# EAGLE board 14250-Qwiic RFID - IDXXLA-Panel (EAGLE 9.2.1), part 1 of 3
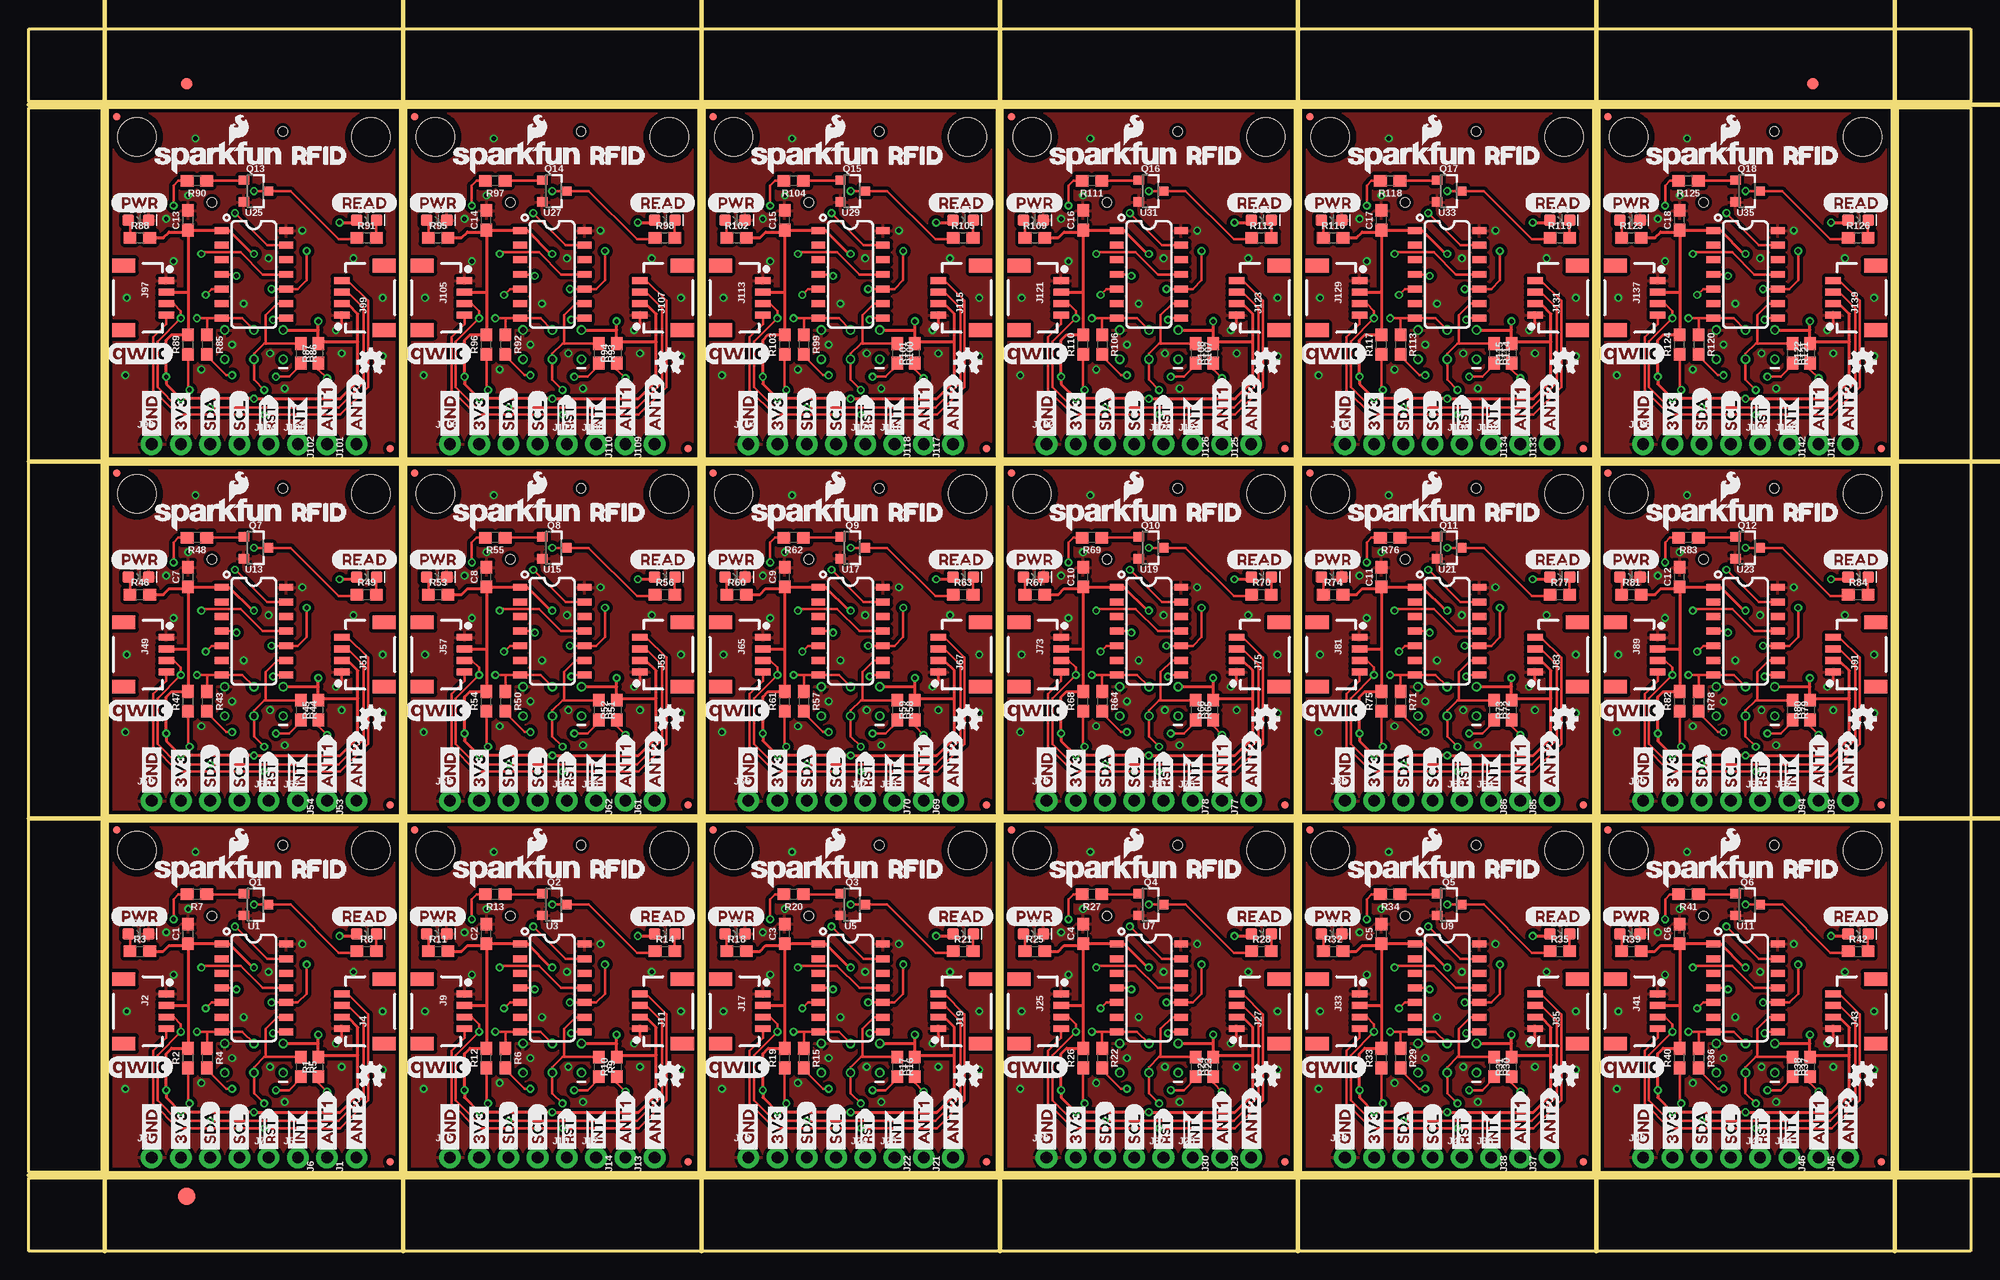
[diagram p0: board, top side]
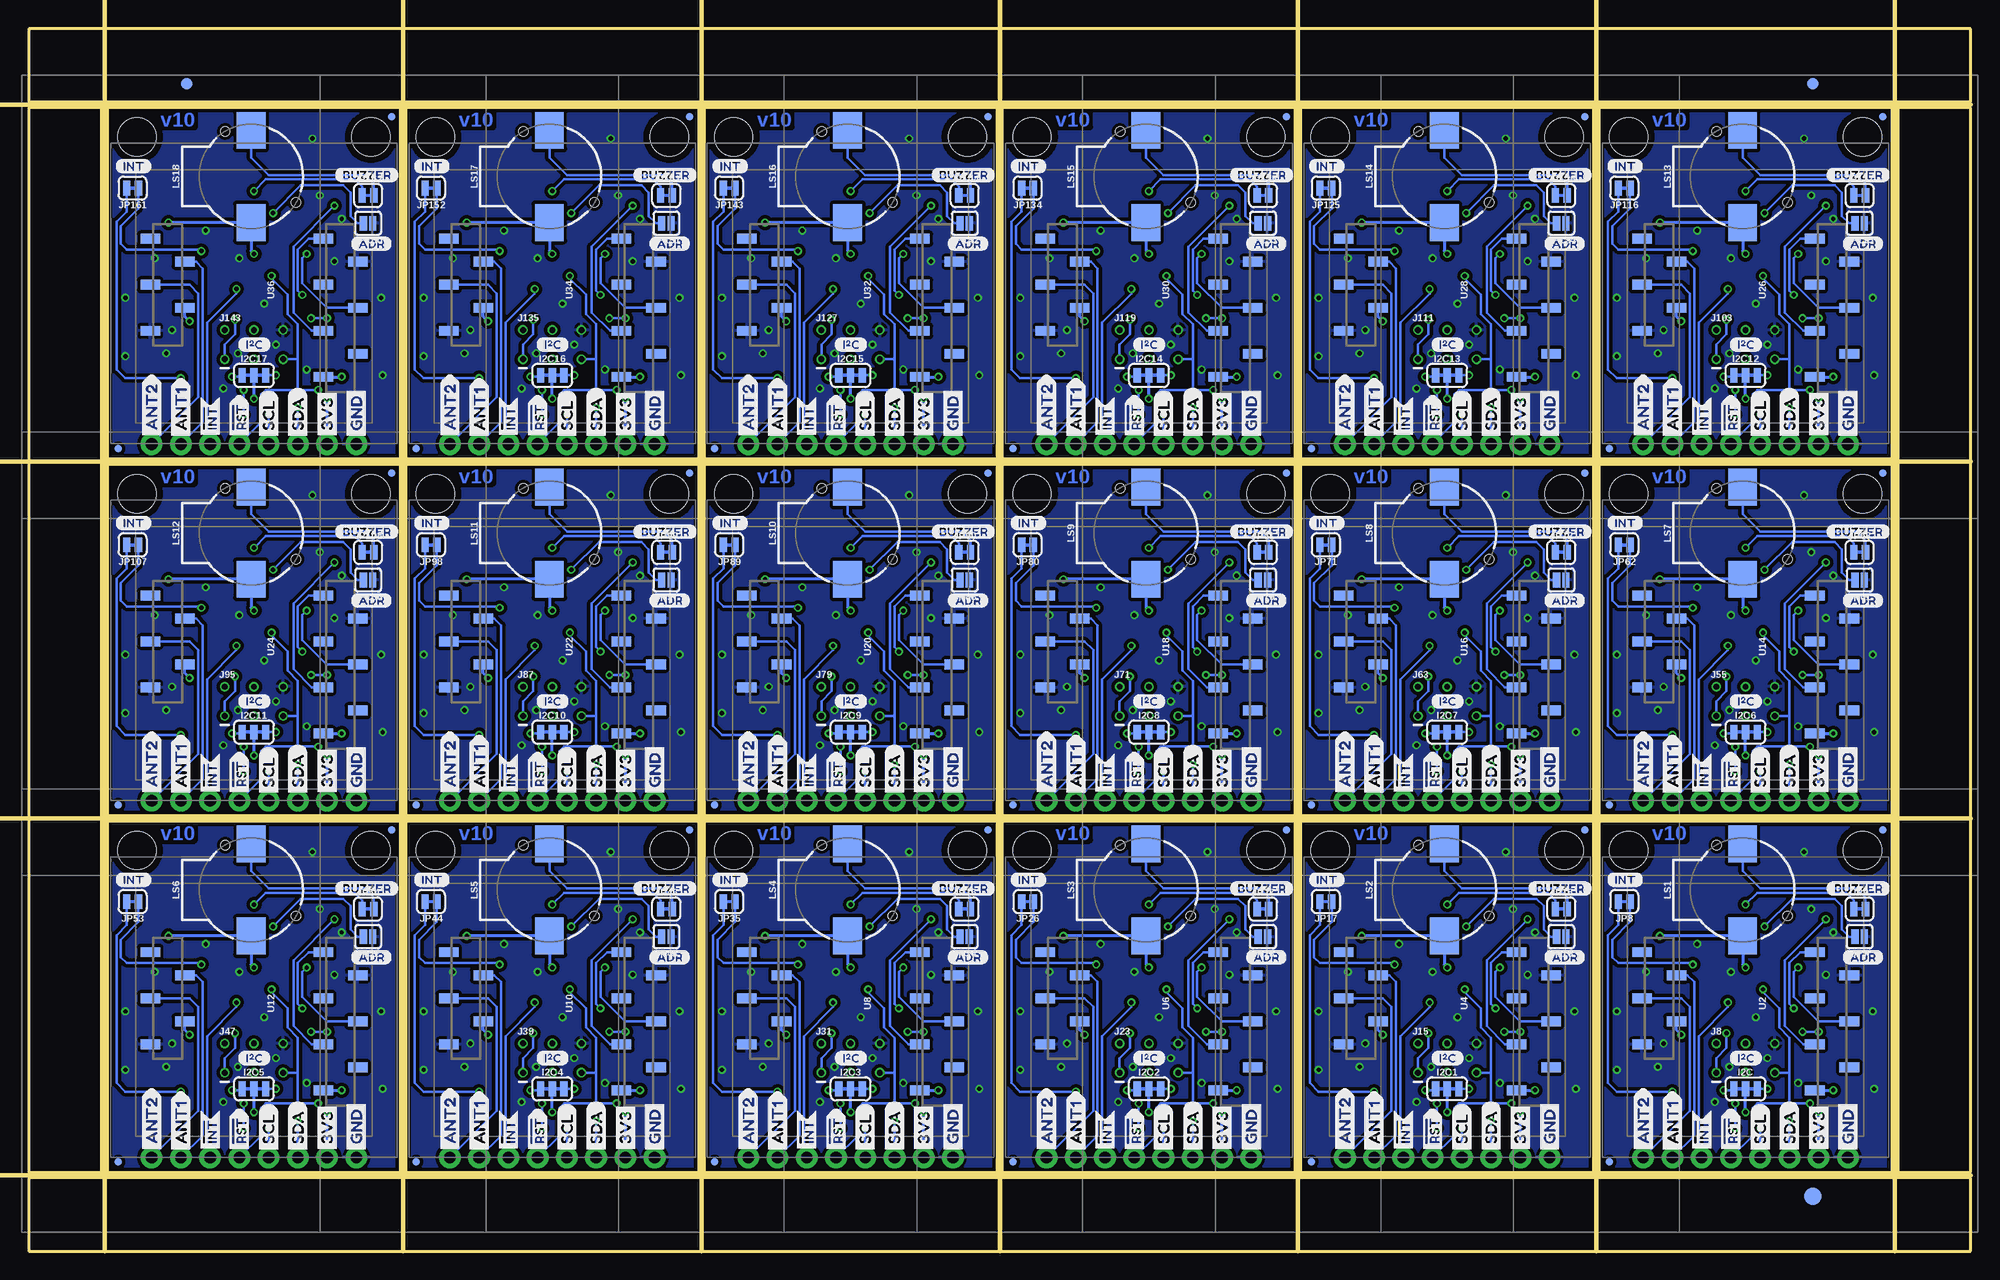
[diagram p1: board, bottom side, seen from below]

Size 168.66 x 106.17 mm. Coordinates in mm from the lower left corner, seen from the top.
Outline: 6.86,6.86 6.86,37.34 32.26,37.34 32.26,6.86 6.86,6.86
Outline: 32.77,6.86 32.77,37.34 58.17,37.34 58.17,6.86 32.77,6.86
Outline: 58.67,6.86 58.67,37.34 84.07,37.34 84.07,6.86 58.67,6.86
Outline: 84.58,6.86 84.58,37.34 109.98,37.34 109.98,6.86 84.58,6.86
Outline: 110.49,6.86 110.49,37.34 135.89,37.34 135.89,6.86 110.49,6.86
Outline: 136.4,6.86 136.4,37.34 161.8,37.34 161.8,6.86 136.4,6.86
Outline: 6.86,37.85 6.86,68.33 32.26,68.33 32.26,37.85 6.86,37.85
Outline: 32.77,37.85 32.77,68.33 58.17,68.33 58.17,37.85 32.77,37.85
Outline: 58.67,37.85 58.67,68.33 84.07,68.33 84.07,37.85 58.67,37.85
Outline: 84.58,37.85 84.58,68.33 109.98,68.33 109.98,37.85 84.58,37.85
Outline: 110.49,37.85 110.49,68.33 135.89,68.33 135.89,37.85 110.49,37.85
Outline: 136.4,37.85 136.4,68.33 161.8,68.33 161.8,37.85 136.4,37.85
Outline: 6.86,68.83 6.86,99.31 32.26,99.31 32.26,68.83 6.86,68.83
Outline: 32.77,68.83 32.77,99.31 58.17,99.31 58.17,68.83 32.77,68.83
Outline: 58.67,68.83 58.67,99.31 84.07,99.31 84.07,68.83 58.67,68.83
Outline: 84.58,68.83 84.58,99.31 109.98,99.31 109.98,68.83 84.58,68.83
Outline: 110.49,68.83 110.49,99.31 135.89,99.31 135.89,68.83 110.49,68.83
Outline: 136.4,68.83 136.4,99.31 161.8,99.31 161.8,68.83 136.4,68.83
Outline: 0,6.35 168.66,6.35 168.66,0 0,0 0,6.35
Outline: 162.31,99.31 168.66,99.31 168.66,6.86 162.31,6.86 162.31,99.31
Outline: 0,106.17 168.66,106.17 168.66,99.82 0,99.82 0,106.17
Outline: 0,99.31 6.35,99.31 6.35,6.86 0,6.86 0,99.31
Copper layers (1*16): Top 0.035mm / dielectric 1.5mm / Bottom 0.035mm
Design rules "SparkFun-2-layer-PCBWay-LIMIT": minimum track width 6mil, minimum drill 0.3mm, track to track 6mil, track to pad 6mil, pad to pad 6mil, via to via 6mil, smd to smd 6mil, copper to edge 6mil, drill to drill 6mil, minimum pad ring 6mil, minimum via ring 6mil, stop-mask expansion 4mil, vias tented up to drill 25mil, thermal gap 10mil
Net classes: 0 default: width 0.203 mm
Milling: 11 lines

## Footprints (pad centres in the part's own frame; a part is rotated, then mirrored left to right if it is on the bottom)
0603 = smd 1.1 x 1: 1 -0.85,0; 2 0.85,0
LED-0603 = smd 1 x 1: A -0.877,0; C 0.877,0
FIDUCIAL-1X2 = smd 1 x 1: 1 0,0
FIDUCIAL-1.5X3 = smd 1.5 x 1.5: 1 0,0
SMT-JUMPER_3_2-NC_TRACE_SILK = smd 0.635 x 1.27: 1 -1.016,0; 2 0,0; 3 1.016,0
1X01_NO_SILK = drill 1.016 pad 1.88: 1 0,0
1X04_1MM_RA = smd 0.6 x 1.35: 1 -1.5,0; 2 -0.5,0; 3 0.5,0; 4 1.5,0 | smd 1.2 x 2: NC1 2.8,-3.675; NC2 -2.8,-3.675
1X04_NO_SILK = drill 1.016 pad 1.88: 1 0,0; 2 2.54,0; 3 5.08,0; 4 7.62,0
2X3_TEST_POINTS = drill 0.508: 1 -2.54,-1.27; 2 -2.54,1.27; 3 0,-1.27; 4 0,1.27; 5 2.54,-1.27; 6 2.54,1.27
MICRO-FIDUCIAL = smd 0.635 x 0.635: 1 0,0
STAND-OFF = hole 3.302: 0,0
SMT-JUMPER_2_NO_SILK = smd 0.635 x 1.27: 1 -0.406,0; 2 0.406,0
SMT-JUMPER_2_NC_TRACE_SILK = smd 0.635 x 1.27: 1 -0.508,0; 2 0.508,0
BUZZER-CCV = smd 3.2 x 2.5: + 4,0; - -4,0 | hole 0.8: -3.9,-2.25; 2.25,3.9
SOT23-3 = smd 0.8 x 0.9: 1 -0.95,-1; 2 0.95,-1; 3 0,1.1
SO14 = smd 0.6 x 1.2: 1 -3.175,-2.8; 2 -1.905,-2.8; 3 -0.635,-2.8; 4 0.635,-2.8; 5 1.905,-2.8; 6 3.175,-2.8; 7 4.445,-2.8; 8 4.445,2.8; 9 3.175,2.8; 10 1.905,2.8; 11 0.635,2.8; 12 -0.635,2.8; 13 -1.905,2.8; 14 -3.175,2.8
ID-12_SMD = smd 0.85 x 1.7: 1 2.993,-8.998; 2 0.993,-5.998; 3 -1.007,-8.998; 4 -3.007,-5.998; 5 -5.007,-8.998; 6 -5.007,6.013; 7 -3.007,9.013; 8 -1.007,6.013; 9 0.993,9.013; 10 2.993,6.013; 11 6.993,6.013; NC 4.993,9.013

## Placement (x,y rotation side)
C1  0.1uF  [0603]  13.84,27.56 90 top
C2  0.1uF  [0603]  39.75,27.56 90 top
C3  0.1uF  [0603]  65.66,27.56 90 top
C4  0.1uF  [0603]  91.57,27.56 90 top
C5  0.1uF  [0603]  117.48,27.56 90 top
C6  0.1uF  [0603]  143.38,27.56 90 top
C7  0.1uF  [0603]  13.84,58.55 90 top
C8  0.1uF  [0603]  39.75,58.55 90 top
C9  0.1uF  [0603]  65.66,58.55 90 top
C10  0.1uF  [0603]  91.57,58.55 90 top
C11  0.1uF  [0603]  117.48,58.55 90 top
C12  0.1uF  [0603]  143.38,58.55 90 top
C13  0.1uF  [0603]  13.84,89.54 90 top
C14  0.1uF  [0603]  39.75,89.54 90 top
C15  0.1uF  [0603]  65.66,89.54 90 top
C16  0.1uF  [0603]  91.57,89.54 90 top
C17  0.1uF  [0603]  117.48,89.54 90 top
C18  0.1uF  [0603]  143.38,89.54 90 top
D1  RED  [LED-0603]  9.52,27.56 0 top
D2  BLUE  [LED-0603]  29.34,27.56 0 top
D3  RED  [LED-0603]  35.43,27.56 0 top
D4  BLUE  [LED-0603]  55.24,27.56 0 top
D5  RED  [LED-0603]  61.34,27.56 0 top
D6  BLUE  [LED-0603]  81.15,27.56 0 top
D7  RED  [LED-0603]  87.25,27.56 0 top
D8  BLUE  [LED-0603]  107.06,27.56 0 top
D9  RED  [LED-0603]  113.16,27.56 0 top
D10  BLUE  [LED-0603]  132.97,27.56 0 top
D11  RED  [LED-0603]  139.06,27.56 0 top
D12  BLUE  [LED-0603]  158.88,27.56 0 top
D13  RED  [LED-0603]  9.52,58.55 0 top
D14  BLUE  [LED-0603]  29.34,58.55 0 top
D15  RED  [LED-0603]  35.43,58.55 0 top
D16  BLUE  [LED-0603]  55.24,58.55 0 top
D17  RED  [LED-0603]  61.34,58.55 0 top
D18  BLUE  [LED-0603]  81.15,58.55 0 top
D19  RED  [LED-0603]  87.25,58.55 0 top
D20  BLUE  [LED-0603]  107.06,58.55 0 top
D21  RED  [LED-0603]  113.16,58.55 0 top
D22  BLUE  [LED-0603]  132.97,58.55 0 top
D23  RED  [LED-0603]  139.06,58.55 0 top
D24  BLUE  [LED-0603]  158.88,58.55 0 top
D25  RED  [LED-0603]  9.52,89.54 0 top
D26  BLUE  [LED-0603]  29.34,89.54 0 top
D27  RED  [LED-0603]  35.43,89.54 0 top
D28  BLUE  [LED-0603]  55.24,89.54 0 top
D29  RED  [LED-0603]  61.34,89.54 0 top
D30  BLUE  [LED-0603]  81.15,89.54 0 top
D31  RED  [LED-0603]  87.25,89.54 0 top
D32  BLUE  [LED-0603]  107.06,89.54 0 top
D33  RED  [LED-0603]  113.16,89.54 0 top
D34  BLUE  [LED-0603]  132.97,89.54 0 top
D35  RED  [LED-0603]  139.06,89.54 0 top
D36  BLUE  [LED-0603]  158.88,89.54 0 top
E$1  [FIDUCIAL-1X2]  13.72,101.41 0 top
E$2  [FIDUCIAL-1X2]  13.72,101.41 0 bottom
E$3  [FIDUCIAL-1X2]  154.94,101.41 0 top
E$4  [FIDUCIAL-1X2]  154.94,101.41 0 bottom
E$5  [FIDUCIAL-1.5X3]  13.72,4.76 0 top
E$6  [FIDUCIAL-1.5X3]  13.72,4.76 0 bottom
I2C  [SMT-JUMPER_3_2-NC_TRACE_SILK]  19.56,14.1 0 bottom
I2C1  [SMT-JUMPER_3_2-NC_TRACE_SILK]  45.47,14.1 0 bottom
I2C2  [SMT-JUMPER_3_2-NC_TRACE_SILK]  71.37,14.1 0 bottom
I2C3  [SMT-JUMPER_3_2-NC_TRACE_SILK]  97.28,14.1 0 bottom
I2C4  [SMT-JUMPER_3_2-NC_TRACE_SILK]  123.19,14.1 0 bottom
I2C5  [SMT-JUMPER_3_2-NC_TRACE_SILK]  149.1,14.1 0 bottom
I2C6  [SMT-JUMPER_3_2-NC_TRACE_SILK]  19.56,45.08 0 bottom
I2C7  [SMT-JUMPER_3_2-NC_TRACE_SILK]  45.47,45.08 0 bottom
I2C8  [SMT-JUMPER_3_2-NC_TRACE_SILK]  71.37,45.08 0 bottom
I2C9  [SMT-JUMPER_3_2-NC_TRACE_SILK]  97.28,45.08 0 bottom
I2C10  [SMT-JUMPER_3_2-NC_TRACE_SILK]  123.19,45.08 0 bottom
I2C11  [SMT-JUMPER_3_2-NC_TRACE_SILK]  149.1,45.08 0 bottom
I2C12  [SMT-JUMPER_3_2-NC_TRACE_SILK]  19.56,76.07 0 bottom
I2C13  [SMT-JUMPER_3_2-NC_TRACE_SILK]  45.47,76.07 0 bottom
I2C14  [SMT-JUMPER_3_2-NC_TRACE_SILK]  71.37,76.07 0 bottom
I2C15  [SMT-JUMPER_3_2-NC_TRACE_SILK]  97.28,76.07 0 bottom
I2C16  [SMT-JUMPER_3_2-NC_TRACE_SILK]  123.19,76.07 0 bottom
I2C17  [SMT-JUMPER_3_2-NC_TRACE_SILK]  149.1,76.07 0 bottom
J1  [1X01_NO_SILK]  28.45,8.13 90 top
J2  [1X04_1MM_RA]  11.94,20.83 270 top
J3  PTH  [1X04_NO_SILK]  10.67,8.13 0 top
J4  [1X04_1MM_RA]  27.18,20.83 90 top
J5  [1X01_NO_SILK]  23.37,8.13 0 top
J6  [1X01_NO_SILK]  25.91,8.13 90 top
J7  [1X01_NO_SILK]  20.83,8.13 0 top
J8  AVR_SPI_PROG_3X2TESTPOINTS  [2X3_TEST_POINTS]  19.56,16.76 0 bottom
J9  [1X04_1MM_RA]  37.85,20.83 270 top
J10  PTH  [1X04_NO_SILK]  36.58,8.13 0 top
J11  [1X04_1MM_RA]  53.09,20.83 90 top
J12  [1X01_NO_SILK]  49.28,8.13 0 top
J13  [1X01_NO_SILK]  54.36,8.13 90 top
J14  [1X01_NO_SILK]  51.82,8.13 90 top
J15  AVR_SPI_PROG_3X2TESTPOINTS  [2X3_TEST_POINTS]  45.47,16.76 0 bottom
J16  [1X01_NO_SILK]  46.74,8.13 0 top
J17  [1X04_1MM_RA]  63.75,20.83 270 top
J18  PTH  [1X04_NO_SILK]  62.48,8.13 0 top
J19  [1X04_1MM_RA]  78.99,20.83 90 top
J20  [1X01_NO_SILK]  75.18,8.13 0 top
J21  [1X01_NO_SILK]  80.26,8.13 90 top
J22  [1X01_NO_SILK]  77.72,8.13 90 top
J23  AVR_SPI_PROG_3X2TESTPOINTS  [2X3_TEST_POINTS]  71.37,16.76 0 bottom
J24  [1X01_NO_SILK]  72.64,8.13 0 top
J25  [1X04_1MM_RA]  89.66,20.83 270 top
J26  PTH  [1X04_NO_SILK]  88.39,8.13 0 top
J27  [1X04_1MM_RA]  104.9,20.83 90 top
J28  [1X01_NO_SILK]  101.09,8.13 0 top
J29  [1X01_NO_SILK]  106.17,8.13 90 top
J30  [1X01_NO_SILK]  103.63,8.13 90 top
J31  AVR_SPI_PROG_3X2TESTPOINTS  [2X3_TEST_POINTS]  97.28,16.76 0 bottom
J32  [1X01_NO_SILK]  98.55,8.13 0 top
J33  [1X04_1MM_RA]  115.57,20.83 270 top
J34  PTH  [1X04_NO_SILK]  114.3,8.13 0 top
J35  [1X04_1MM_RA]  130.81,20.83 90 top
J36  [1X01_NO_SILK]  127,8.13 0 top
J37  [1X01_NO_SILK]  132.08,8.13 90 top
J38  [1X01_NO_SILK]  129.54,8.13 90 top
J39  AVR_SPI_PROG_3X2TESTPOINTS  [2X3_TEST_POINTS]  123.19,16.76 0 bottom
J40  [1X01_NO_SILK]  124.46,8.13 0 top
J41  [1X04_1MM_RA]  141.48,20.83 270 top
J42  PTH  [1X04_NO_SILK]  140.21,8.13 0 top
J43  [1X04_1MM_RA]  156.72,20.83 90 top
J44  [1X01_NO_SILK]  152.91,8.13 0 top
J45  [1X01_NO_SILK]  157.99,8.13 90 top
J46  [1X01_NO_SILK]  155.45,8.13 90 top
J47  AVR_SPI_PROG_3X2TESTPOINTS  [2X3_TEST_POINTS]  149.1,16.76 0 bottom
J48  [1X01_NO_SILK]  150.37,8.13 0 top
J49  [1X04_1MM_RA]  11.94,51.82 270 top
J50  PTH  [1X04_NO_SILK]  10.67,39.12 0 top
J51  [1X04_1MM_RA]  27.18,51.82 90 top
J52  [1X01_NO_SILK]  23.37,39.12 0 top
J53  [1X01_NO_SILK]  28.45,39.12 90 top
J54  [1X01_NO_SILK]  25.91,39.12 90 top
J55  AVR_SPI_PROG_3X2TESTPOINTS  [2X3_TEST_POINTS]  19.56,47.75 0 bottom
J56  [1X01_NO_SILK]  20.83,39.12 0 top
J57  [1X04_1MM_RA]  37.85,51.82 270 top
J58  PTH  [1X04_NO_SILK]  36.58,39.12 0 top
J59  [1X04_1MM_RA]  53.09,51.82 90 top
J60  [1X01_NO_SILK]  49.28,39.12 0 top
J61  [1X01_NO_SILK]  54.36,39.12 90 top
J62  [1X01_NO_SILK]  51.82,39.12 90 top
J63  AVR_SPI_PROG_3X2TESTPOINTS  [2X3_TEST_POINTS]  45.47,47.75 0 bottom
J64  [1X01_NO_SILK]  46.74,39.12 0 top
J65  [1X04_1MM_RA]  63.75,51.82 270 top
J66  PTH  [1X04_NO_SILK]  62.48,39.12 0 top
J67  [1X04_1MM_RA]  78.99,51.82 90 top
J68  [1X01_NO_SILK]  75.18,39.12 0 top
J69  [1X01_NO_SILK]  80.26,39.12 90 top
J70  [1X01_NO_SILK]  77.72,39.12 90 top
J71  AVR_SPI_PROG_3X2TESTPOINTS  [2X3_TEST_POINTS]  71.37,47.75 0 bottom
J72  [1X01_NO_SILK]  72.64,39.12 0 top
J73  [1X04_1MM_RA]  89.66,51.82 270 top
J74  PTH  [1X04_NO_SILK]  88.39,39.12 0 top
J75  [1X04_1MM_RA]  104.9,51.82 90 top
J76  [1X01_NO_SILK]  101.09,39.12 0 top
J77  [1X01_NO_SILK]  106.17,39.12 90 top
J78  [1X01_NO_SILK]  103.63,39.12 90 top
J79  AVR_SPI_PROG_3X2TESTPOINTS  [2X3_TEST_POINTS]  97.28,47.75 0 bottom
J80  [1X01_NO_SILK]  98.55,39.12 0 top
J81  [1X04_1MM_RA]  115.57,51.82 270 top
J82  PTH  [1X04_NO_SILK]  114.3,39.12 0 top
J83  [1X04_1MM_RA]  130.81,51.82 90 top
J84  [1X01_NO_SILK]  127,39.12 0 top
J85  [1X01_NO_SILK]  132.08,39.12 90 top
J86  [1X01_NO_SILK]  129.54,39.12 90 top
J87  AVR_SPI_PROG_3X2TESTPOINTS  [2X3_TEST_POINTS]  123.19,47.75 0 bottom
J88  [1X01_NO_SILK]  124.46,39.12 0 top
J89  [1X04_1MM_RA]  141.48,51.82 270 top
J90  PTH  [1X04_NO_SILK]  140.21,39.12 0 top
J91  [1X04_1MM_RA]  156.72,51.82 90 top
J92  [1X01_NO_SILK]  152.91,39.12 0 top
J93  [1X01_NO_SILK]  157.99,39.12 90 top
J94  [1X01_NO_SILK]  155.45,39.12 90 top
J95  AVR_SPI_PROG_3X2TESTPOINTS  [2X3_TEST_POINTS]  149.1,47.75 0 bottom
J96  [1X01_NO_SILK]  150.37,39.12 0 top
J97  [1X04_1MM_RA]  11.94,82.8 270 top
J98  PTH  [1X04_NO_SILK]  10.67,70.1 0 top
J99  [1X04_1MM_RA]  27.18,82.8 90 top
J100  [1X01_NO_SILK]  23.37,70.1 0 top
J101  [1X01_NO_SILK]  28.45,70.1 90 top
J102  [1X01_NO_SILK]  25.91,70.1 90 top
J103  AVR_SPI_PROG_3X2TESTPOINTS  [2X3_TEST_POINTS]  19.56,78.74 0 bottom
J104  [1X01_NO_SILK]  20.83,70.1 0 top
J105  [1X04_1MM_RA]  37.85,82.8 270 top
J106  PTH  [1X04_NO_SILK]  36.58,70.1 0 top
J107  [1X04_1MM_RA]  53.09,82.8 90 top
J108  [1X01_NO_SILK]  49.28,70.1 0 top
J109  [1X01_NO_SILK]  54.36,70.1 90 top
J110  [1X01_NO_SILK]  51.82,70.1 90 top
J111  AVR_SPI_PROG_3X2TESTPOINTS  [2X3_TEST_POINTS]  45.47,78.74 0 bottom
J112  [1X01_NO_SILK]  46.74,70.1 0 top
J113  [1X04_1MM_RA]  63.75,82.8 270 top
J114  PTH  [1X04_NO_SILK]  62.48,70.1 0 top
J115  [1X04_1MM_RA]  78.99,82.8 90 top
J116  [1X01_NO_SILK]  75.18,70.1 0 top
J117  [1X01_NO_SILK]  80.26,70.1 90 top
J118  [1X01_NO_SILK]  77.72,70.1 90 top
J119  AVR_SPI_PROG_3X2TESTPOINTS  [2X3_TEST_POINTS]  71.37,78.74 0 bottom
J120  [1X01_NO_SILK]  72.64,70.1 0 top
J121  [1X04_1MM_RA]  89.66,82.8 270 top
J122  PTH  [1X04_NO_SILK]  88.39,70.1 0 top
J123  [1X04_1MM_RA]  104.9,82.8 90 top
J124  [1X01_NO_SILK]  101.09,70.1 0 top
J125  [1X01_NO_SILK]  106.17,70.1 90 top
J126  [1X01_NO_SILK]  103.63,70.1 90 top
J127  AVR_SPI_PROG_3X2TESTPOINTS  [2X3_TEST_POINTS]  97.28,78.74 0 bottom
J128  [1X01_NO_SILK]  98.55,70.1 0 top
J129  [1X04_1MM_RA]  115.57,82.8 270 top
J130  PTH  [1X04_NO_SILK]  114.3,70.1 0 top
J131  [1X04_1MM_RA]  130.81,82.8 90 top
J132  [1X01_NO_SILK]  127,70.1 0 top
J133  [1X01_NO_SILK]  132.08,70.1 90 top
J134  [1X01_NO_SILK]  129.54,70.1 90 top
J135  AVR_SPI_PROG_3X2TESTPOINTS  [2X3_TEST_POINTS]  123.19,78.74 0 bottom
J136  [1X01_NO_SILK]  124.46,70.1 0 top
J137  [1X04_1MM_RA]  141.48,82.8 270 top
J138  PTH  [1X04_NO_SILK]  140.21,70.1 0 top
J139  [1X04_1MM_RA]  156.72,82.8 90 top
J140  [1X01_NO_SILK]  152.91,70.1 0 top
J141  [1X01_NO_SILK]  157.99,70.1 90 top
J142  [1X01_NO_SILK]  155.45,70.1 90 top
J143  AVR_SPI_PROG_3X2TESTPOINTS  [2X3_TEST_POINTS]  149.1,78.74 0 bottom
J144  [1X01_NO_SILK]  150.37,70.1 0 top
JP1  FIDUCIALUFIDUCIAL  [MICRO-FIDUCIAL]  7.62,36.58 0 bottom
JP2  FIDUCIALUFIDUCIAL  [MICRO-FIDUCIAL]  31.37,7.75 0 top
JP3  STAND-OFF  [STAND-OFF]  9.4,34.8 0 top
JP4  STAND-OFF  [STAND-OFF]  29.72,34.8 0 top
JP5  FIDUCIALUFIDUCIAL  [MICRO-FIDUCIAL]  31.37,7.75 0 bottom
JP6  FIDUCIALUFIDUCIAL  [MICRO-FIDUCIAL]  7.62,36.58 0 top
JP7  ADR  [SMT-JUMPER_2_NO_SILK]  9.65,27.3 180 bottom
JP8  INT  [SMT-JUMPER_2_NC_TRACE_SILK]  30.1,30.35 180 bottom
JP9  BUZZ  [SMT-JUMPER_2_NC_TRACE_SILK]  9.65,29.72 0 bottom
JP10  STAND-OFF  [STAND-OFF]  35.31,34.8 0 top
JP11  STAND-OFF  [STAND-OFF]  55.63,34.8 0 top
JP12  FIDUCIALUFIDUCIAL  [MICRO-FIDUCIAL]  57.28,7.75 0 top
JP13  FIDUCIALUFIDUCIAL  [MICRO-FIDUCIAL]  33.53,36.58 0 top
JP14  FIDUCIALUFIDUCIAL  [MICRO-FIDUCIAL]  33.53,36.58 0 bottom
JP15  FIDUCIALUFIDUCIAL  [MICRO-FIDUCIAL]  57.28,7.75 0 bottom
JP16  ADR  [SMT-JUMPER_2_NO_SILK]  35.56,27.3 180 bottom
JP17  INT  [SMT-JUMPER_2_NC_TRACE_SILK]  56.01,30.35 180 bottom
JP18  BUZZ  [SMT-JUMPER_2_NC_TRACE_SILK]  35.56,29.72 0 bottom
JP19  STAND-OFF  [STAND-OFF]  61.21,34.8 0 top
JP20  STAND-OFF  [STAND-OFF]  81.53,34.8 0 top
JP21  FIDUCIALUFIDUCIAL  [MICRO-FIDUCIAL]  83.19,7.75 0 top
JP22  FIDUCIALUFIDUCIAL  [MICRO-FIDUCIAL]  59.44,36.58 0 top
JP23  FIDUCIALUFIDUCIAL  [MICRO-FIDUCIAL]  59.44,36.58 0 bottom
JP24  FIDUCIALUFIDUCIAL  [MICRO-FIDUCIAL]  83.19,7.75 0 bottom
JP25  ADR  [SMT-JUMPER_2_NO_SILK]  61.47,27.3 180 bottom
JP26  INT  [SMT-JUMPER_2_NC_TRACE_SILK]  81.92,30.35 180 bottom
JP27  BUZZ  [SMT-JUMPER_2_NC_TRACE_SILK]  61.47,29.72 0 bottom
JP28  STAND-OFF  [STAND-OFF]  87.12,34.8 0 top
JP29  STAND-OFF  [STAND-OFF]  107.44,34.8 0 top
JP30  FIDUCIALUFIDUCIAL  [MICRO-FIDUCIAL]  109.09,7.75 0 top
JP31  FIDUCIALUFIDUCIAL  [MICRO-FIDUCIAL]  85.34,36.58 0 top
JP32  FIDUCIALUFIDUCIAL  [MICRO-FIDUCIAL]  85.34,36.58 0 bottom
JP33  FIDUCIALUFIDUCIAL  [MICRO-FIDUCIAL]  109.09,7.75 0 bottom
JP34  ADR  [SMT-JUMPER_2_NO_SILK]  87.38,27.3 180 bottom
JP35  INT  [SMT-JUMPER_2_NC_TRACE_SILK]  107.82,30.35 180 bottom
JP36  BUZZ  [SMT-JUMPER_2_NC_TRACE_SILK]  87.38,29.72 0 bottom
JP37  STAND-OFF  [STAND-OFF]  113.03,34.8 0 top
JP38  STAND-OFF  [STAND-OFF]  133.35,34.8 0 top
JP39  FIDUCIALUFIDUCIAL  [MICRO-FIDUCIAL]  135,7.75 0 top
JP40  FIDUCIALUFIDUCIAL  [MICRO-FIDUCIAL]  111.25,36.58 0 top
JP41  FIDUCIALUFIDUCIAL  [MICRO-FIDUCIAL]  111.25,36.58 0 bottom
JP42  FIDUCIALUFIDUCIAL  [MICRO-FIDUCIAL]  135,7.75 0 bottom
JP43  ADR  [SMT-JUMPER_2_NO_SILK]  113.28,27.3 180 bottom
JP44  INT  [SMT-JUMPER_2_NC_TRACE_SILK]  133.73,30.35 180 bottom
JP45  BUZZ  [SMT-JUMPER_2_NC_TRACE_SILK]  113.28,29.72 0 bottom
JP46  STAND-OFF  [STAND-OFF]  138.94,34.8 0 top
JP47  STAND-OFF  [STAND-OFF]  159.26,34.8 0 top
JP48  FIDUCIALUFIDUCIAL  [MICRO-FIDUCIAL]  160.91,7.75 0 top
JP49  FIDUCIALUFIDUCIAL  [MICRO-FIDUCIAL]  137.16,36.58 0 top
JP50  FIDUCIALUFIDUCIAL  [MICRO-FIDUCIAL]  137.16,36.58 0 bottom
JP51  FIDUCIALUFIDUCIAL  [MICRO-FIDUCIAL]  160.91,7.75 0 bottom
JP52  ADR  [SMT-JUMPER_2_NO_SILK]  139.19,27.3 180 bottom
JP53  INT  [SMT-JUMPER_2_NC_TRACE_SILK]  159.64,30.35 180 bottom
JP54  BUZZ  [SMT-JUMPER_2_NC_TRACE_SILK]  139.19,29.72 0 bottom
JP55  STAND-OFF  [STAND-OFF]  9.4,65.79 0 top
JP56  STAND-OFF  [STAND-OFF]  29.72,65.79 0 top
JP57  FIDUCIALUFIDUCIAL  [MICRO-FIDUCIAL]  31.37,38.73 0 top
JP58  FIDUCIALUFIDUCIAL  [MICRO-FIDUCIAL]  7.62,67.56 0 top
JP59  FIDUCIALUFIDUCIAL  [MICRO-FIDUCIAL]  7.62,67.56 0 bottom
JP60  FIDUCIALUFIDUCIAL  [MICRO-FIDUCIAL]  31.37,38.73 0 bottom
JP61  ADR  [SMT-JUMPER_2_NO_SILK]  9.65,58.29 180 bottom
JP62  INT  [SMT-JUMPER_2_NC_TRACE_SILK]  30.1,61.34 180 bottom
JP63  BUZZ  [SMT-JUMPER_2_NC_TRACE_SILK]  9.65,60.71 0 bottom
JP64  STAND-OFF  [STAND-OFF]  35.31,65.79 0 top
JP65  STAND-OFF  [STAND-OFF]  55.63,65.79 0 top
JP66  FIDUCIALUFIDUCIAL  [MICRO-FIDUCIAL]  57.28,38.73 0 top
JP67  FIDUCIALUFIDUCIAL  [MICRO-FIDUCIAL]  33.53,67.56 0 top
JP68  FIDUCIALUFIDUCIAL  [MICRO-FIDUCIAL]  33.53,67.56 0 bottom
JP69  FIDUCIALUFIDUCIAL  [MICRO-FIDUCIAL]  57.28,38.73 0 bottom
JP70  ADR  [SMT-JUMPER_2_NO_SILK]  35.56,58.29 180 bottom
JP71  INT  [SMT-JUMPER_2_NC_TRACE_SILK]  56.01,61.34 180 bottom
JP72  BUZZ  [SMT-JUMPER_2_NC_TRACE_SILK]  35.56,60.71 0 bottom
JP73  STAND-OFF  [STAND-OFF]  61.21,65.79 0 top
JP74  STAND-OFF  [STAND-OFF]  81.53,65.79 0 top
JP75  FIDUCIALUFIDUCIAL  [MICRO-FIDUCIAL]  83.19,38.73 0 top
JP76  FIDUCIALUFIDUCIAL  [MICRO-FIDUCIAL]  59.44,67.56 0 top
JP77  FIDUCIALUFIDUCIAL  [MICRO-FIDUCIAL]  59.44,67.56 0 bottom
JP78  FIDUCIALUFIDUCIAL  [MICRO-FIDUCIAL]  83.19,38.73 0 bottom
JP79  ADR  [SMT-JUMPER_2_NO_SILK]  61.47,58.29 180 bottom
JP80  INT  [SMT-JUMPER_2_NC_TRACE_SILK]  81.92,61.34 180 bottom
JP81  BUZZ  [SMT-JUMPER_2_NC_TRACE_SILK]  61.47,60.71 0 bottom
JP82  STAND-OFF  [STAND-OFF]  87.12,65.79 0 top
JP83  STAND-OFF  [STAND-OFF]  107.44,65.79 0 top
JP84  FIDUCIALUFIDUCIAL  [MICRO-FIDUCIAL]  109.09,38.73 0 top
JP85  FIDUCIALUFIDUCIAL  [MICRO-FIDUCIAL]  85.34,67.56 0 top
JP86  FIDUCIALUFIDUCIAL  [MICRO-FIDUCIAL]  85.34,67.56 0 bottom
JP87  FIDUCIALUFIDUCIAL  [MICRO-FIDUCIAL]  109.09,38.73 0 bottom
JP88  ADR  [SMT-JUMPER_2_NO_SILK]  87.38,58.29 180 bottom
JP89  INT  [SMT-JUMPER_2_NC_TRACE_SILK]  107.82,61.34 180 bottom
JP90  BUZZ  [SMT-JUMPER_2_NC_TRACE_SILK]  87.38,60.71 0 bottom
JP91  STAND-OFF  [STAND-OFF]  113.03,65.79 0 top
JP92  STAND-OFF  [STAND-OFF]  133.35,65.79 0 top
JP93  FIDUCIALUFIDUCIAL  [MICRO-FIDUCIAL]  135,38.73 0 top
JP94  FIDUCIALUFIDUCIAL  [MICRO-FIDUCIAL]  111.25,67.56 0 top
JP95  FIDUCIALUFIDUCIAL  [MICRO-FIDUCIAL]  111.25,67.56 0 bottom
JP96  FIDUCIALUFIDUCIAL  [MICRO-FIDUCIAL]  135,38.73 0 bottom
JP97  ADR  [SMT-JUMPER_2_NO_SILK]  113.28,58.29 180 bottom
JP98  INT  [SMT-JUMPER_2_NC_TRACE_SILK]  133.73,61.34 180 bottom
JP99  BUZZ  [SMT-JUMPER_2_NC_TRACE_SILK]  113.28,60.71 0 bottom
JP100  STAND-OFF  [STAND-OFF]  138.94,65.79 0 top
JP101  STAND-OFF  [STAND-OFF]  159.26,65.79 0 top
JP102  FIDUCIALUFIDUCIAL  [MICRO-FIDUCIAL]  160.91,38.73 0 top
JP103  FIDUCIALUFIDUCIAL  [MICRO-FIDUCIAL]  137.16,67.56 0 top
JP104  FIDUCIALUFIDUCIAL  [MICRO-FIDUCIAL]  137.16,67.56 0 bottom
JP105  FIDUCIALUFIDUCIAL  [MICRO-FIDUCIAL]  160.91,38.73 0 bottom
JP106  ADR  [SMT-JUMPER_2_NO_SILK]  139.19,58.29 180 bottom
JP107  INT  [SMT-JUMPER_2_NC_TRACE_SILK]  159.64,61.34 180 bottom
JP108  BUZZ  [SMT-JUMPER_2_NC_TRACE_SILK]  139.19,60.71 0 bottom
JP109  STAND-OFF  [STAND-OFF]  9.4,96.77 0 top
JP110  STAND-OFF  [STAND-OFF]  29.72,96.77 0 top
JP111  FIDUCIALUFIDUCIAL  [MICRO-FIDUCIAL]  31.37,69.72 0 top
JP112  FIDUCIALUFIDUCIAL  [MICRO-FIDUCIAL]  7.62,98.55 0 top
JP113  FIDUCIALUFIDUCIAL  [MICRO-FIDUCIAL]  7.62,98.55 0 bottom
JP114  FIDUCIALUFIDUCIAL  [MICRO-FIDUCIAL]  31.37,69.72 0 bottom
JP115  ADR  [SMT-JUMPER_2_NO_SILK]  9.65,89.28 180 bottom
JP116  INT  [SMT-JUMPER_2_NC_TRACE_SILK]  30.1,92.33 180 bottom
JP117  BUZZ  [SMT-JUMPER_2_NC_TRACE_SILK]  9.65,91.69 0 bottom
JP118  STAND-OFF  [STAND-OFF]  35.31,96.77 0 top
JP119  STAND-OFF  [STAND-OFF]  55.63,96.77 0 top
JP120  FIDUCIALUFIDUCIAL  [MICRO-FIDUCIAL]  57.28,69.72 0 top
JP121  FIDUCIALUFIDUCIAL  [MICRO-FIDUCIAL]  33.53,98.55 0 top
JP122  FIDUCIALUFIDUCIAL  [MICRO-FIDUCIAL]  33.53,98.55 0 bottom
JP123  FIDUCIALUFIDUCIAL  [MICRO-FIDUCIAL]  57.28,69.72 0 bottom
JP124  ADR  [SMT-JUMPER_2_NO_SILK]  35.56,89.28 180 bottom
JP125  INT  [SMT-JUMPER_2_NC_TRACE_SILK]  56.01,92.33 180 bottom
JP126  BUZZ  [SMT-JUMPER_2_NC_TRACE_SILK]  35.56,91.69 0 bottom
JP127  STAND-OFF  [STAND-OFF]  61.21,96.77 0 top
JP128  STAND-OFF  [STAND-OFF]  81.53,96.77 0 top
JP129  FIDUCIALUFIDUCIAL  [MICRO-FIDUCIAL]  83.19,69.72 0 top
JP130  FIDUCIALUFIDUCIAL  [MICRO-FIDUCIAL]  59.44,98.55 0 top
JP131  FIDUCIALUFIDUCIAL  [MICRO-FIDUCIAL]  59.44,98.55 0 bottom
JP132  FIDUCIALUFIDUCIAL  [MICRO-FIDUCIAL]  83.19,69.72 0 bottom
JP133  ADR  [SMT-JUMPER_2_NO_SILK]  61.47,89.28 180 bottom
JP134  INT  [SMT-JUMPER_2_NC_TRACE_SILK]  81.92,92.33 180 bottom
JP135  BUZZ  [SMT-JUMPER_2_NC_TRACE_SILK]  61.47,91.69 0 bottom
JP136  STAND-OFF  [STAND-OFF]  87.12,96.77 0 top
JP137  STAND-OFF  [STAND-OFF]  107.44,96.77 0 top
JP138  FIDUCIALUFIDUCIAL  [MICRO-FIDUCIAL]  109.09,69.72 0 top
JP139  FIDUCIALUFIDUCIAL  [MICRO-FIDUCIAL]  85.34,98.55 0 top
JP140  FIDUCIALUFIDUCIAL  [MICRO-FIDUCIAL]  85.34,98.55 0 bottom
JP141  FIDUCIALUFIDUCIAL  [MICRO-FIDUCIAL]  109.09,69.72 0 bottom
JP142  ADR  [SMT-JUMPER_2_NO_SILK]  87.38,89.28 180 bottom
JP143  INT  [SMT-JUMPER_2_NC_TRACE_SILK]  107.82,92.33 180 bottom
JP144  BUZZ  [SMT-JUMPER_2_NC_TRACE_SILK]  87.38,91.69 0 bottom
JP145  STAND-OFF  [STAND-OFF]  113.03,96.77 0 top
JP146  STAND-OFF  [STAND-OFF]  133.35,96.77 0 top
JP147  FIDUCIALUFIDUCIAL  [MICRO-FIDUCIAL]  135,69.72 0 top
JP148  FIDUCIALUFIDUCIAL  [MICRO-FIDUCIAL]  111.25,98.55 0 top
JP149  FIDUCIALUFIDUCIAL  [MICRO-FIDUCIAL]  111.25,98.55 0 bottom
JP150  FIDUCIALUFIDUCIAL  [MICRO-FIDUCIAL]  135,69.72 0 bottom
JP151  ADR  [SMT-JUMPER_2_NO_SILK]  113.28,89.28 180 bottom
JP152  INT  [SMT-JUMPER_2_NC_TRACE_SILK]  133.73,92.33 180 bottom
JP153  BUZZ  [SMT-JUMPER_2_NC_TRACE_SILK]  113.28,91.69 0 bottom
JP154  STAND-OFF  [STAND-OFF]  138.94,96.77 0 top
JP155  STAND-OFF  [STAND-OFF]  159.26,96.77 0 top
JP156  FIDUCIALUFIDUCIAL  [MICRO-FIDUCIAL]  160.91,69.72 0 top
JP157  FIDUCIALUFIDUCIAL  [MICRO-FIDUCIAL]  137.16,98.55 0 top
JP158  FIDUCIALUFIDUCIAL  [MICRO-FIDUCIAL]  137.16,98.55 0 bottom
JP159  FIDUCIALUFIDUCIAL  [MICRO-FIDUCIAL]  160.91,69.72 0 bottom
JP160  ADR  [SMT-JUMPER_2_NO_SILK]  139.19,89.28 180 bottom
JP161  INT  [SMT-JUMPER_2_NC_TRACE_SILK]  159.64,92.33 180 bottom
JP162  BUZZ  [SMT-JUMPER_2_NC_TRACE_SILK]  139.19,91.69 0 bottom
LOGO1  OSHW-LOGOMINI  [OSHW-LOGO-MINI]  29.72,15.24 0 top
LOGO2  OSHW-LOGOMINI  [OSHW-LOGO-MINI]  55.63,15.24 0 top
LOGO3  SFE_LOGO_NAME_FLAME.1_INCH  [SFE_LOGO_NAME_FLAME_.1]  16.51,33.02 0 top
LOGO4  SFE_LOGO_NAME_FLAME.1_INCH  [SFE_LOGO_NAME_FLAME_.1]  42.42,33.02 0 top
LOGO5  OSHW-LOGOMINI  [OSHW-LOGO-MINI]  81.53,15.24 0 top
LOGO6  SFE_LOGO_NAME_FLAME.1_INCH  [SFE_LOGO_NAME_FLAME_.1]  68.33,33.02 0 top
LOGO7  OSHW-LOGOMINI  [OSHW-LOGO-MINI]  107.44,15.24 0 top
LOGO8  SFE_LOGO_NAME_FLAME.1_INCH  [SFE_LOGO_NAME_FLAME_.1]  94.23,33.02 0 top
LOGO9  OSHW-LOGOMINI  [OSHW-LOGO-MINI]  133.35,15.24 0 top
LOGO10  SFE_LOGO_NAME_FLAME.1_INCH  [SFE_LOGO_NAME_FLAME_.1]  120.14,33.02 0 top
LOGO11  OSHW-LOGOMINI  [OSHW-LOGO-MINI]  159.26,15.24 0 top
LOGO12  SFE_LOGO_NAME_FLAME.1_INCH  [SFE_LOGO_NAME_FLAME_.1]  146.05,33.02 0 top
LOGO13  OSHW-LOGOMINI  [OSHW-LOGO-MINI]  29.72,46.23 0 top
LOGO14  SFE_LOGO_NAME_FLAME.1_INCH  [SFE_LOGO_NAME_FLAME_.1]  16.51,64.01 0 top
LOGO15  OSHW-LOGOMINI  [OSHW-LOGO-MINI]  55.63,46.23 0 top
LOGO16  SFE_LOGO_NAME_FLAME.1_INCH  [SFE_LOGO_NAME_FLAME_.1]  42.42,64.01 0 top
LOGO17  OSHW-LOGOMINI  [OSHW-LOGO-MINI]  81.53,46.23 0 top
LOGO18  SFE_LOGO_NAME_FLAME.1_INCH  [SFE_LOGO_NAME_FLAME_.1]  68.33,64.01 0 top
LOGO19  OSHW-LOGOMINI  [OSHW-LOGO-MINI]  107.44,46.23 0 top
LOGO20  SFE_LOGO_NAME_FLAME.1_INCH  [SFE_LOGO_NAME_FLAME_.1]  94.23,64.01 0 top
LOGO21  OSHW-LOGOMINI  [OSHW-LOGO-MINI]  133.35,46.23 0 top
LOGO22  SFE_LOGO_NAME_FLAME.1_INCH  [SFE_LOGO_NAME_FLAME_.1]  120.14,64.01 0 top
LOGO23  OSHW-LOGOMINI  [OSHW-LOGO-MINI]  159.26,46.23 0 top
LOGO24  SFE_LOGO_NAME_FLAME.1_INCH  [SFE_LOGO_NAME_FLAME_.1]  146.05,64.01 0 top
LOGO25  OSHW-LOGOMINI  [OSHW-LOGO-MINI]  29.72,77.22 0 top
LOGO26  SFE_LOGO_NAME_FLAME.1_INCH  [SFE_LOGO_NAME_FLAME_.1]  16.51,95 0 top
LOGO27  OSHW-LOGOMINI  [OSHW-LOGO-MINI]  55.63,77.22 0 top
LOGO28  SFE_LOGO_NAME_FLAME.1_INCH  [SFE_LOGO_NAME_FLAME_.1]  42.42,95 0 top
LOGO29  OSHW-LOGOMINI  [OSHW-LOGO-MINI]  81.53,77.22 0 top
LOGO30  SFE_LOGO_NAME_FLAME.1_INCH  [SFE_LOGO_NAME_FLAME_.1]  68.33,95 0 top
LOGO31  OSHW-LOGOMINI  [OSHW-LOGO-MINI]  107.44,77.22 0 top
LOGO32  SFE_LOGO_NAME_FLAME.1_INCH  [SFE_LOGO_NAME_FLAME_.1]  94.23,95 0 top
LOGO33  OSHW-LOGOMINI  [OSHW-LOGO-MINI]  133.35,77.22 0 top
LOGO34  SFE_LOGO_NAME_FLAME.1_INCH  [SFE_LOGO_NAME_FLAME_.1]  120.14,95 0 top
LOGO35  OSHW-LOGOMINI  [OSHW-LOGO-MINI]  159.26,77.22 0 top
LOGO36  SFE_LOGO_NAME_FLAME.1_INCH  [SFE_LOGO_NAME_FLAME_.1]  146.05,95 0 top
LS1  BUZZER-SMD  [BUZZER-CCV]  19.81,31.37 270 bottom
LS2  BUZZER-SMD  [BUZZER-CCV]  45.72,31.37 270 bottom
LS3  BUZZER-SMD  [BUZZER-CCV]  71.63,31.37 270 bottom
LS4  BUZZER-SMD  [BUZZER-CCV]  97.54,31.37 270 bottom
LS5  BUZZER-SMD  [BUZZER-CCV]  123.44,31.37 270 bottom
LS6  BUZZER-SMD  [BUZZER-CCV]  149.35,31.37 270 bottom
LS7  BUZZER-SMD  [BUZZER-CCV]  19.81,62.36 270 bottom
LS8  BUZZER-SMD  [BUZZER-CCV]  45.72,62.36 270 bottom
LS9  BUZZER-SMD  [BUZZER-CCV]  71.63,62.36 270 bottom
LS10  BUZZER-SMD  [BUZZER-CCV]  97.54,62.36 270 bottom
LS11  BUZZER-SMD  [BUZZER-CCV]  123.44,62.36 270 bottom
LS12  BUZZER-SMD  [BUZZER-CCV]  149.35,62.36 270 bottom
LS13  BUZZER-SMD  [BUZZER-CCV]  19.81,93.34 270 bottom
LS14  BUZZER-SMD  [BUZZER-CCV]  45.72,93.34 270 bottom
LS15  BUZZER-SMD  [BUZZER-CCV]  71.63,93.34 270 bottom
LS16  BUZZER-SMD  [BUZZER-CCV]  97.54,93.34 270 bottom
LS17  BUZZER-SMD  [BUZZER-CCV]  123.44,93.34 270 bottom
LS18  BUZZER-SMD  [BUZZER-CCV]  149.35,93.34 270 bottom
Q1  600mA/40V  [SOT23-3]  19.68,30.1 270 top
Q2  600mA/40V  [SOT23-3]  45.59,30.1 270 top
Q3  600mA/40V  [SOT23-3]  71.5,30.1 270 top
Q4  600mA/40V  [SOT23-3]  97.41,30.1 270 top
Q5  600mA/40V  [SOT23-3]  123.32,30.1 270 top
Q6  600mA/40V  [SOT23-3]  149.22,30.1 270 top
Q7  600mA/40V  [SOT23-3]  19.68,61.09 270 top
Q8  600mA/40V  [SOT23-3]  45.59,61.09 270 top
Q9  600mA/40V  [SOT23-3]  71.5,61.09 270 top
Q10  600mA/40V  [SOT23-3]  97.41,61.09 270 top
Q11  600mA/40V  [SOT23-3]  123.32,61.09 270 top
Q12  600mA/40V  [SOT23-3]  149.22,61.09 270 top
Q13  600mA/40V  [SOT23-3]  19.68,92.08 270 top
Q14  600mA/40V  [SOT23-3]  45.59,92.08 270 top
Q15  600mA/40V  [SOT23-3]  71.5,92.08 270 top
Q16  600mA/40V  [SOT23-3]  97.41,92.08 270 top
Q17  600mA/40V  [SOT23-3]  123.32,92.08 270 top
Q18  600mA/40V  [SOT23-3]  149.22,92.08 270 top
R1  10k  [0603]  25.15,16 90 top
R2  10k  [0603]  13.84,16.76 90 top
R3  1k  [0603]  9.65,26.04 0 top
R4  2.2k  [0603]  15.49,16.76 270 top
R5  2.2k  [0603]  23.62,16 270 top
R6  2.2k  [0603]  41.4,16.76 270 top
R7  1k  [0603]  14.61,30.99 180 top
R8  1k  [0603]  29.34,26.04 0 top
R9  2.2k  [0603]  49.53,16 270 top
R10  10k  [0603]  51.05,16 90 top
R11  1k  [0603]  35.56,26.04 0 top
R12  10k  [0603]  39.75,16.76 90 top
R13  1k  [0603]  40.51,30.99 180 top
R14  1k  [0603]  55.24,26.04 0 top
R15  2.2k  [0603]  67.31,16.76 270 top
R16  2.2k  [0603]  75.44,16 270 top
R17  10k  [0603]  76.96,16 90 top
R18  1k  [0603]  61.47,26.04 0 top
R19  10k  [0603]  65.66,16.76 90 top
R20  1k  [0603]  66.42,30.99 180 top
R21  1k  [0603]  81.15,26.04 0 top
R22  2.2k  [0603]  93.22,16.76 270 top
R23  2.2k  [0603]  101.35,16 270 top
R24  10k  [0603]  102.87,16 90 top
R25  1k  [0603]  87.38,26.04 0 top
R26  10k  [0603]  91.57,16.76 90 top
R27  1k  [0603]  92.33,30.99 180 top
R28  1k  [0603]  107.06,26.04 0 top
R29  2.2k  [0603]  119.13,16.76 270 top
R30  2.2k  [0603]  127.25,16 270 top
R31  10k  [0603]  128.78,16 90 top
R32  1k  [0603]  113.28,26.04 0 top
R33  10k  [0603]  117.48,16.76 90 top
R34  1k  [0603]  118.24,30.99 180 top
R35  1k  [0603]  132.97,26.04 0 top
R36  2.2k  [0603]  145.03,16.76 270 top
R37  2.2k  [0603]  153.16,16 270 top
R38  10k  [0603]  154.69,16 90 top
R39  1k  [0603]  139.19,26.04 0 top
R40  10k  [0603]  143.38,16.76 90 top
R41  1k  [0603]  144.15,30.99 180 top
R42  1k  [0603]  158.88,26.04 0 top
R43  2.2k  [0603]  15.49,47.75 270 top
R44  2.2k  [0603]  23.62,46.99 270 top
R45  10k  [0603]  25.15,46.99 90 top
R46  1k  [0603]  9.65,57.02 0 top
R47  10k  [0603]  13.84,47.75 90 top
R48  1k  [0603]  14.61,61.98 180 top
R49  1k  [0603]  29.34,57.02 0 top
R50  2.2k  [0603]  41.4,47.75 270 top
R51  2.2k  [0603]  49.53,46.99 270 top
R52  10k  [0603]  51.05,46.99 90 top
R53  1k  [0603]  35.56,57.02 0 top
R54  10k  [0603]  39.75,47.75 90 top
R55  1k  [0603]  40.51,61.98 180 top
R56  1k  [0603]  55.24,57.02 0 top
R57  2.2k  [0603]  67.31,47.75 270 top
R58  2.2k  [0603]  75.44,46.99 270 top
R59  10k  [0603]  76.96,46.99 90 top
R60  1k  [0603]  61.47,57.02 0 top
R61  10k  [0603]  65.66,47.75 90 top
R62  1k  [0603]  66.42,61.98 180 top
R63  1k  [0603]  81.15,57.02 0 top
R64  2.2k  [0603]  93.22,47.75 270 top
R65  2.2k  [0603]  101.35,46.99 270 top
R66  10k  [0603]  102.87,46.99 90 top
R67  1k  [0603]  87.38,57.02 0 top
R68  10k  [0603]  91.57,47.75 90 top
R69  1k  [0603]  92.33,61.98 180 top
R70  1k  [0603]  107.06,57.02 0 top
R71  2.2k  [0603]  119.13,47.75 270 top
R72  2.2k  [0603]  127.25,46.99 270 top
R73  10k  [0603]  128.78,46.99 90 top
R74  1k  [0603]  113.28,57.02 0 top
R75  10k  [0603]  117.48,47.75 90 top
R76  1k  [0603]  118.24,61.98 180 top
R77  1k  [0603]  132.97,57.02 0 top
R78  2.2k  [0603]  145.03,47.75 270 top
R79  2.2k  [0603]  153.16,46.99 270 top
R80  10k  [0603]  154.69,46.99 90 top
R81  1k  [0603]  139.19,57.02 0 top
R82  10k  [0603]  143.38,47.75 90 top
R83  1k  [0603]  144.15,61.98 180 top
R84  1k  [0603]  158.88,57.02 0 top
R85  2.2k  [0603]  15.49,78.74 270 top
R86  2.2k  [0603]  23.62,77.98 270 top
R87  10k  [0603]  25.15,77.98 90 top
R88  1k  [0603]  9.65,88.01 0 top
R89  10k  [0603]  13.84,78.74 90 top
R90  1k  [0603]  14.61,92.96 180 top
R91  1k  [0603]  29.34,88.01 0 top
R92  2.2k  [0603]  41.4,78.74 270 top
R93  2.2k  [0603]  49.53,77.98 270 top
R94  10k  [0603]  51.05,77.98 90 top
R95  1k  [0603]  35.56,88.01 0 top
R96  10k  [0603]  39.75,78.74 90 top
R97  1k  [0603]  40.51,92.96 180 top
R98  1k  [0603]  55.24,88.01 0 top
R99  2.2k  [0603]  67.31,78.74 270 top
R100  2.2k  [0603]  75.44,77.98 270 top
R101  10k  [0603]  76.96,77.98 90 top
R102  1k  [0603]  61.47,88.01 0 top
R103  10k  [0603]  65.66,78.74 90 top
R104  1k  [0603]  66.42,92.96 180 top
R105  1k  [0603]  81.15,88.01 0 top
R106  2.2k  [0603]  93.22,78.74 270 top
R107  2.2k  [0603]  101.35,77.98 270 top
R108  10k  [0603]  102.87,77.98 90 top
R109  1k  [0603]  87.38,88.01 0 top
R110  10k  [0603]  91.57,78.74 90 top
R111  1k  [0603]  92.33,92.96 180 top
R112  1k  [0603]  107.06,88.01 0 top
R113  2.2k  [0603]  119.13,78.74 270 top
R114  2.2k  [0603]  127.25,77.98 270 top
R115  10k  [0603]  128.78,77.98 90 top
R116  1k  [0603]  113.28,88.01 0 top
R117  10k  [0603]  117.48,78.74 90 top
R118  1k  [0603]  118.24,92.96 180 top
R119  1k  [0603]  132.97,88.01 0 top
R120  2.2k  [0603]  145.03,78.74 270 top
R121  2.2k  [0603]  153.16,77.98 270 top
R122  10k  [0603]  154.69,77.98 90 top
R123  1k  [0603]  139.19,88.01 0 top
R124  10k  [0603]  143.38,78.74 90 top
R125  1k  [0603]  144.15,92.96 180 top
R126  1k  [0603]  158.88,88.01 0 top
U1  ATTINY84-ARDUINO  [SO14]  19.56,23.5 270 top
U2  ID-12/20SMD  [ID-12_SMD]  19.56,20.95 270 bottom
U3  ATTINY84-ARDUINO  [SO14]  45.47,23.5 270 top
U4  ID-12/20SMD  [ID-12_SMD]  45.47,20.95 270 bottom
U5  ATTINY84-ARDUINO  [SO14]  71.37,23.5 270 top
U6  ID-12/20SMD  [ID-12_SMD]  71.37,20.95 270 bottom
U7  ATTINY84-ARDUINO  [SO14]  97.28,23.5 270 top
U8  ID-12/20SMD  [ID-12_SMD]  97.28,20.95 270 bottom
U9  ATTINY84-ARDUINO  [SO14]  123.19,23.5 270 top
U10  ID-12/20SMD  [ID-12_SMD]  123.19,20.95 270 bottom
U11  ATTINY84-ARDUINO  [SO14]  149.1,23.5 270 top
U12  ID-12/20SMD  [ID-12_SMD]  149.1,20.95 270 bottom
U13  ATTINY84-ARDUINO  [SO14]  19.56,54.48 270 top
U14  ID-12/20SMD  [ID-12_SMD]  19.56,51.94 270 bottom
U15  ATTINY84-ARDUINO  [SO14]  45.47,54.48 270 top
U16  ID-12/20SMD  [ID-12_SMD]  45.47,51.94 270 bottom
U17  ATTINY84-ARDUINO  [SO14]  71.37,54.48 270 top
U18  ID-12/20SMD  [ID-12_SMD]  71.37,51.94 270 bottom
U19  ATTINY84-ARDUINO  [SO14]  97.28,54.48 270 top
U20  ID-12/20SMD  [ID-12_SMD]  97.28,51.94 270 bottom
U21  ATTINY84-ARDUINO  [SO14]  123.19,54.48 270 top
U22  ID-12/20SMD  [ID-12_SMD]  123.19,51.94 270 bottom
U23  ATTINY84-ARDUINO  [SO14]  149.1,54.48 270 top
U24  ID-12/20SMD  [ID-12_SMD]  149.1,51.94 270 bottom
U25  ATTINY84-ARDUINO  [SO14]  19.56,85.47 270 top
U26  ID-12/20SMD  [ID-12_SMD]  19.56,82.93 270 bottom
U27  ATTINY84-ARDUINO  [SO14]  45.47,85.47 270 top
U28  ID-12/20SMD  [ID-12_SMD]  45.47,82.93 270 bottom
U29  ATTINY84-ARDUINO  [SO14]  71.37,85.47 270 top
U30  ID-12/20SMD  [ID-12_SMD]  71.37,82.93 270 bottom
U31  ATTINY84-ARDUINO  [SO14]  97.28,85.47 270 top
U32  ID-12/20SMD  [ID-12_SMD]  97.28,82.93 270 bottom
U33  ATTINY84-ARDUINO  [SO14]  123.19,85.47 270 top
U34  ID-12/20SMD  [ID-12_SMD]  123.19,82.93 270 bottom
U35  ATTINY84-ARDUINO  [SO14]  149.1,85.47 270 top
U36  ID-12/20SMD  [ID-12_SMD]  149.1,82.93 270 bottom
U$1  [QWIIC_COPYRIGHT_SMALL]  9.65,16 0 top
U$2  [I_SUPER2_C-()-03]  20.95,16.76 0 bottom
U$3  [ANT20]  28.45,8.38 90 bottom
U$4  [PWR-()-04]  7.11,29.08 0 top
U$5  [RST#-[>]  20.83,8.25 90 top
U$6  [SDA-[)]  15.75,8.38 90 top
U$7  [SCL-[)]  18.29,8.38 90 top
U$8  [RFID0]  21.44,33.2 0 top
U$9  [GND-04]  10.67,8.38 90 top
U$10  [3V3-04]  13.21,8.38 90 top
U$11  [INT#-[<]  23.37,8.25 90 top
U$12  [ADR0]  11.18,25.53 0 bottom
U$13  [INT0]  31.62,32.26 0 bottom
U$14  [RST#-[>]  46.74,8.25 90 top
U$15  [BUZZER0]  12.57,31.5 0 bottom
U$16  [ANT10]  25.91,8.38 90 top
U$17  [ANT20]  28.45,8.38 90 top
U$18  [READ0]  26.29,29.08 0 top
U$19  [SDA-[)]  41.66,8.38 90 top
U$20  [ANT10]  25.91,8.38 90 bottom
U$21  [INT#-[<]  23.37,8.25 90 bottom
U$22  [SCL-[)]  18.29,8.38 90 bottom
U$23  [SDA-[)]  15.75,8.38 90 bottom
U$24  [3V3-04]  13.21,8.38 90 bottom
U$25  [GND-04]  10.67,8.38 90 bottom
U$26  [RST#-[>]  20.83,8.25 90 bottom
U$27  [SCL-[)]  44.2,8.38 90 top
U$28  [GND-04]  36.58,8.38 90 top
U$29  [3V3-04]  39.12,8.38 90 top
U$30  [INT#-[<]  49.28,8.25 90 top
U$31  [BUZZER0]  38.48,31.5 0 bottom
U$32  [ANT10]  51.82,8.38 90 top
U$33  [ANT20]  54.36,8.38 90 top
U$34  [READ0]  52.2,29.08 0 top
U$35  [ANT20]  54.36,8.38 90 bottom
U$36  [ANT10]  51.82,8.38 90 bottom
U$37  [INT#-[<]  49.28,8.25 90 bottom
U$38  [SCL-[)]  44.2,8.38 90 bottom
U$39  [SDA-[)]  41.66,8.38 90 bottom
U$40  [3V3-04]  39.12,8.38 90 bottom
U$41  [GND-04]  36.58,8.38 90 bottom
U$42  [RST#-[>]  46.74,8.25 90 bottom
U$43  [I_SUPER2_C-()-03]  46.86,16.76 0 bottom
U$44  [ADR0]  37.08,25.53 0 bottom
U$45  [INT0]  57.53,32.26 0 bottom
U$46  [PWR-()-04]  33.02,29.08 0 top
U$47  [QWIIC_COPYRIGHT_SMALL]  35.56,16 0 top
U$48  [RFID0]  47.35,33.2 0 top
U$49  [RST#-[>]  72.64,8.25 90 top
U$50  [SDA-[)]  67.56,8.38 90 top
U$51  [SCL-[)]  70.1,8.38 90 top
U$52  [GND-04]  62.48,8.38 90 top
U$53  [3V3-04]  65.02,8.38 90 top
U$54  [INT#-[<]  75.18,8.25 90 top
U$55  [BUZZER0]  64.39,31.5 0 bottom
U$56  [ANT10]  77.72,8.38 90 top
U$57  [ANT20]  80.26,8.38 90 top
U$58  [READ0]  78.11,29.08 0 top
U$59  [ANT20]  80.26,8.38 90 bottom
U$60  [ANT10]  77.72,8.38 90 bottom
U$61  [INT#-[<]  75.18,8.25 90 bottom
U$62  [SCL-[)]  70.1,8.38 90 bottom
U$63  [SDA-[)]  67.56,8.38 90 bottom
U$64  [3V3-04]  65.02,8.38 90 bottom
U$65  [GND-04]  62.48,8.38 90 bottom
U$66  [RST#-[>]  72.64,8.25 90 bottom
U$67  [I_SUPER2_C-()-03]  72.77,16.76 0 bottom
U$68  [ADR0]  62.99,25.53 0 bottom
U$69  [INT0]  83.44,32.26 0 bottom
U$70  [PWR-()-04]  58.93,29.08 0 top
U$71  [QWIIC_COPYRIGHT_SMALL]  61.47,16 0 top
U$72  [RFID0]  73.25,33.2 0 top
U$73  [RST#-[>]  98.55,8.25 90 top
U$74  [SDA-[)]  93.47,8.38 90 top
U$75  [SCL-[)]  96.01,8.38 90 top
U$76  [GND-04]  88.39,8.38 90 top
U$77  [3V3-04]  90.93,8.38 90 top
U$78  [INT#-[<]  101.09,8.25 90 top
U$79  [BUZZER0]  90.3,31.5 0 bottom
U$80  [ANT10]  103.63,8.38 90 top
U$81  [ANT20]  106.17,8.38 90 top
U$82  [READ0]  104.01,29.08 0 top
U$83  [ANT20]  106.17,8.38 90 bottom
U$84  [ANT10]  103.63,8.38 90 bottom
U$85  [INT#-[<]  101.09,8.25 90 bottom
U$86  [SCL-[)]  96.01,8.38 90 bottom
U$87  [SDA-[)]  93.47,8.38 90 bottom
U$88  [3V3-04]  90.93,8.38 90 bottom
U$89  [GND-04]  88.39,8.38 90 bottom
U$90  [RST#-[>]  98.55,8.25 90 bottom
U$91  [I_SUPER2_C-()-03]  98.68,16.76 0 bottom
U$92  [ADR0]  88.9,25.53 0 bottom
U$93  [INT0]  109.35,32.26 0 bottom
U$94  [PWR-()-04]  84.84,29.08 0 top
U$95  [QWIIC_COPYRIGHT_SMALL]  87.38,16 0 top
U$96  [RFID0]  99.16,33.2 0 top
U$97  [RST#-[>]  124.46,8.25 90 top
U$98  [SDA-[)]  119.38,8.38 90 top
U$99  [SCL-[)]  121.92,8.38 90 top
U$100  [GND-04]  114.3,8.38 90 top
U$101  [3V3-04]  116.84,8.38 90 top
U$102  [INT#-[<]  127,8.25 90 top
U$103  [BUZZER0]  116.2,31.5 0 bottom
U$104  [ANT10]  129.54,8.38 90 top
U$105  [ANT20]  132.08,8.38 90 top
U$106  [READ0]  129.92,29.08 0 top
U$107  [ANT20]  132.08,8.38 90 bottom
U$108  [ANT10]  129.54,8.38 90 bottom
U$109  [INT#-[<]  127,8.25 90 bottom
U$110  [SCL-[)]  121.92,8.38 90 bottom
U$111  [SDA-[)]  119.38,8.38 90 bottom
U$112  [3V3-04]  116.84,8.38 90 bottom
U$113  [GND-04]  114.3,8.38 90 bottom
U$114  [RST#-[>]  124.46,8.25 90 bottom
U$115  [I_SUPER2_C-()-03]  124.59,16.76 0 bottom
U$116  [ADR0]  114.81,25.53 0 bottom
U$117  [INT0]  135.25,32.26 0 bottom
U$118  [PWR-()-04]  110.74,29.08 0 top
U$119  [QWIIC_COPYRIGHT_SMALL]  113.28,16 0 top
U$120  [RFID0]  125.07,33.2 0 top
U$121  [RST#-[>]  150.37,8.25 90 top
U$122  [SDA-[)]  145.29,8.38 90 top
U$123  [SCL-[)]  147.83,8.38 90 top
U$124  [GND-04]  140.21,8.38 90 top
U$125  [3V3-04]  142.75,8.38 90 top
U$126  [INT#-[<]  152.91,8.25 90 top
U$127  [BUZZER0]  142.11,31.5 0 bottom
U$128  [ANT10]  155.45,8.38 90 top
U$129  [ANT20]  157.99,8.38 90 top
U$130  [READ0]  155.83,29.08 0 top
U$131  [ANT20]  157.99,8.38 90 bottom
U$132  [ANT10]  155.45,8.38 90 bottom
U$133  [INT#-[<]  152.91,8.25 90 bottom
U$134  [SCL-[)]  147.83,8.38 90 bottom
U$135  [SDA-[)]  145.29,8.38 90 bottom
U$136  [3V3-04]  142.75,8.38 90 bottom
U$137  [GND-04]  140.21,8.38 90 bottom
U$138  [RST#-[>]  150.37,8.25 90 bottom
U$139  [I_SUPER2_C-()-03]  150.5,16.76 0 bottom
U$140  [ADR0]  140.72,25.53 0 bottom
U$141  [INT0]  161.16,32.26 0 bottom
U$142  [PWR-()-04]  136.65,29.08 0 top
U$143  [QWIIC_COPYRIGHT_SMALL]  139.19,16 0 top
U$144  [RFID0]  150.98,33.2 0 top
U$145  [RST#-[>]  20.83,39.24 90 top
U$146  [SDA-[)]  15.75,39.37 90 top
U$147  [SCL-[)]  18.29,39.37 90 top
U$148  [GND-04]  10.67,39.37 90 top
U$149  [3V3-04]  13.21,39.37 90 top
U$150  [INT#-[<]  23.37,39.24 90 top
U$151  [BUZZER0]  12.57,62.48 0 bottom
U$152  [ANT10]  25.91,39.37 90 top
U$153  [ANT20]  28.45,39.37 90 top
U$154  [READ0]  26.29,60.07 0 top
U$155  [ANT20]  28.45,39.37 90 bottom
U$156  [ANT10]  25.91,39.37 90 bottom
U$157  [INT#-[<]  23.37,39.24 90 bottom
U$158  [SCL-[)]  18.29,39.37 90 bottom
U$159  [SDA-[)]  15.75,39.37 90 bottom
U$160  [3V3-04]  13.21,39.37 90 bottom
U$161  [GND-04]  10.67,39.37 90 bottom
U$162  [RST#-[>]  20.83,39.24 90 bottom
U$163  [I_SUPER2_C-()-03]  20.95,47.75 0 bottom
U$164  [ADR0]  11.18,56.51 0 bottom
U$165  [INT0]  31.62,63.25 0 bottom
U$166  [PWR-()-04]  7.11,60.07 0 top
U$167  [QWIIC_COPYRIGHT_SMALL]  9.65,46.99 0 top
U$168  [RFID0]  21.44,64.19 0 top
U$169  [RST#-[>]  46.74,39.24 90 top
U$170  [SDA-[)]  41.66,39.37 90 top
U$171  [SCL-[)]  44.2,39.37 90 top
U$172  [GND-04]  36.58,39.37 90 top
U$173  [3V3-04]  39.12,39.37 90 top
U$174  [INT#-[<]  49.28,39.24 90 top
U$175  [BUZZER0]  38.48,62.48 0 bottom
U$176  [ANT10]  51.82,39.37 90 top
U$177  [ANT20]  54.36,39.37 90 top
U$178  [READ0]  52.2,60.07 0 top
U$179  [ANT20]  54.36,39.37 90 bottom
U$180  [ANT10]  51.82,39.37 90 bottom
U$181  [INT#-[<]  49.28,39.24 90 bottom
U$182  [SCL-[)]  44.2,39.37 90 bottom
U$183  [SDA-[)]  41.66,39.37 90 bottom
U$184  [3V3-04]  39.12,39.37 90 bottom
U$185  [GND-04]  36.58,39.37 90 bottom
U$186  [RST#-[>]  46.74,39.24 90 bottom
U$187  [I_SUPER2_C-()-03]  46.86,47.75 0 bottom
U$188  [ADR0]  37.08,56.51 0 bottom
U$189  [INT0]  57.53,63.25 0 bottom
U$190  [PWR-()-04]  33.02,60.07 0 top
U$191  [QWIIC_COPYRIGHT_SMALL]  35.56,46.99 0 top
U$192  [RFID0]  47.35,64.19 0 top
U$193  [RST#-[>]  72.64,39.24 90 top
U$194  [SDA-[)]  67.56,39.37 90 top
U$195  [SCL-[)]  70.1,39.37 90 top
U$196  [GND-04]  62.48,39.37 90 top
U$197  [3V3-04]  65.02,39.37 90 top
U$198  [INT#-[<]  75.18,39.24 90 top
U$199  [BUZZER0]  64.39,62.48 0 bottom
U$200  [ANT10]  77.72,39.37 90 top
U$201  [ANT20]  80.26,39.37 90 top
U$202  [READ0]  78.11,60.07 0 top
U$203  [ANT20]  80.26,39.37 90 bottom
U$204  [ANT10]  77.72,39.37 90 bottom
U$205  [INT#-[<]  75.18,39.24 90 bottom
U$206  [SCL-[)]  70.1,39.37 90 bottom
U$207  [SDA-[)]  67.56,39.37 90 bottom
U$208  [3V3-04]  65.02,39.37 90 bottom
U$209  [GND-04]  62.48,39.37 90 bottom
U$210  [RST#-[>]  72.64,39.24 90 bottom
U$211  [I_SUPER2_C-()-03]  72.77,47.75 0 bottom
U$212  [ADR0]  62.99,56.51 0 bottom
U$213  [INT0]  83.44,63.25 0 bottom
U$214  [PWR-()-04]  58.93,60.07 0 top
U$215  [QWIIC_COPYRIGHT_SMALL]  61.47,46.99 0 top
U$216  [RFID0]  73.25,64.19 0 top
U$217  [RST#-[>]  98.55,39.24 90 top
U$218  [SDA-[)]  93.47,39.37 90 top
U$219  [SCL-[)]  96.01,39.37 90 top
U$220  [GND-04]  88.39,39.37 90 top
U$221  [3V3-04]  90.93,39.37 90 top
U$222  [INT#-[<]  101.09,39.24 90 top
U$223  [BUZZER0]  90.3,62.48 0 bottom
U$224  [ANT10]  103.63,39.37 90 top
U$225  [ANT20]  106.17,39.37 90 top
U$226  [READ0]  104.01,60.07 0 top
U$227  [ANT20]  106.17,39.37 90 bottom
U$228  [ANT10]  103.63,39.37 90 bottom
U$229  [INT#-[<]  101.09,39.24 90 bottom
U$230  [SCL-[)]  96.01,39.37 90 bottom
U$231  [SDA-[)]  93.47,39.37 90 bottom
U$232  [3V3-04]  90.93,39.37 90 bottom
U$233  [GND-04]  88.39,39.37 90 bottom
U$234  [RST#-[>]  98.55,39.24 90 bottom
U$235  [I_SUPER2_C-()-03]  98.68,47.75 0 bottom
U$236  [ADR0]  88.9,56.51 0 bottom
U$237  [INT0]  109.35,63.25 0 bottom
U$238  [PWR-()-04]  84.84,60.07 0 top
U$239  [QWIIC_COPYRIGHT_SMALL]  87.38,46.99 0 top
U$240  [RFID0]  99.16,64.19 0 top
U$241  [RST#-[>]  124.46,39.24 90 top
U$242  [SDA-[)]  119.38,39.37 90 top
U$243  [SCL-[)]  121.92,39.37 90 top
U$244  [GND-04]  114.3,39.37 90 top
U$245  [3V3-04]  116.84,39.37 90 top
U$246  [INT#-[<]  127,39.24 90 top
U$247  [BUZZER0]  116.2,62.48 0 bottom
U$248  [ANT10]  129.54,39.37 90 top
U$249  [ANT20]  132.08,39.37 90 top
U$250  [READ0]  129.92,60.07 0 top
U$251  [ANT20]  132.08,39.37 90 bottom
U$252  [ANT10]  129.54,39.37 90 bottom
U$253  [INT#-[<]  127,39.24 90 bottom
U$254  [SCL-[)]  121.92,39.37 90 bottom
U$255  [SDA-[)]  119.38,39.37 90 bottom
U$256  [3V3-04]  116.84,39.37 90 bottom
U$257  [GND-04]  114.3,39.37 90 bottom
U$258  [RST#-[>]  124.46,39.24 90 bottom
U$259  [I_SUPER2_C-()-03]  124.59,47.75 0 bottom
U$260  [ADR0]  114.81,56.51 0 bottom
U$261  [INT0]  135.25,63.25 0 bottom
U$262  [PWR-()-04]  110.74,60.07 0 top
U$263  [QWIIC_COPYRIGHT_SMALL]  113.28,46.99 0 top
U$264  [RFID0]  125.07,64.19 0 top
U$265  [RST#-[>]  150.37,39.24 90 top
U$266  [SDA-[)]  145.29,39.37 90 top
U$267  [SCL-[)]  147.83,39.37 90 top
U$268  [GND-04]  140.21,39.37 90 top
U$269  [3V3-04]  142.75,39.37 90 top
U$270  [INT#-[<]  152.91,39.24 90 top
U$271  [BUZZER0]  142.11,62.48 0 bottom
U$272  [ANT10]  155.45,39.37 90 top
U$273  [ANT20]  157.99,39.37 90 top
U$274  [READ0]  155.83,60.07 0 top
U$275  [ANT20]  157.99,39.37 90 bottom
U$276  [ANT10]  155.45,39.37 90 bottom
U$277  [INT#-[<]  152.91,39.24 90 bottom
U$278  [SCL-[)]  147.83,39.37 90 bottom
U$279  [SDA-[)]  145.29,39.37 90 bottom
U$280  [3V3-04]  142.75,39.37 90 bottom
U$281  [GND-04]  140.21,39.37 90 bottom
U$282  [RST#-[>]  150.37,39.24 90 bottom
U$283  [I_SUPER2_C-()-03]  150.5,47.75 0 bottom
U$284  [ADR0]  140.72,56.51 0 bottom
U$285  [INT0]  161.16,63.25 0 bottom
U$286  [PWR-()-04]  136.65,60.07 0 top
U$287  [QWIIC_COPYRIGHT_SMALL]  139.19,46.99 0 top
U$288  [RFID0]  150.98,64.19 0 top
U$289  [RST#-[>]  20.83,70.23 90 top
U$290  [SDA-[)]  15.75,70.36 90 top
U$291  [SCL-[)]  18.29,70.36 90 top
U$292  [GND-04]  10.67,70.36 90 top
U$293  [3V3-04]  13.21,70.36 90 top
U$294  [INT#-[<]  23.37,70.23 90 top
U$295  [BUZZER0]  12.57,93.47 0 bottom
U$296  [ANT10]  25.91,70.36 90 top
U$297  [ANT20]  28.45,70.36 90 top
U$298  [READ0]  26.29,91.06 0 top
U$299  [ANT20]  28.45,70.36 90 bottom
U$300  [ANT10]  25.91,70.36 90 bottom
U$301  [INT#-[<]  23.37,70.23 90 bottom
U$302  [SCL-[)]  18.29,70.36 90 bottom
U$303  [SDA-[)]  15.75,70.36 90 bottom
U$304  [3V3-04]  13.21,70.36 90 bottom
U$305  [GND-04]  10.67,70.36 90 bottom
U$306  [RST#-[>]  20.83,70.23 90 bottom
U$307  [I_SUPER2_C-()-03]  20.95,78.74 0 bottom
U$308  [ADR0]  11.18,87.5 0 bottom
U$309  [INT0]  31.62,94.23 0 bottom
U$310  [PWR-()-04]  7.11,91.06 0 top
U$311  [QWIIC_COPYRIGHT_SMALL]  9.65,77.98 0 top
U$312  [RFID0]  21.44,95.17 0 top
U$313  [RST#-[>]  46.74,70.23 90 top
U$314  [SDA-[)]  41.66,70.36 90 top
U$315  [SCL-[)]  44.2,70.36 90 top
U$316  [GND-04]  36.58,70.36 90 top
U$317  [3V3-04]  39.12,70.36 90 top
U$318  [INT#-[<]  49.28,70.23 90 top
U$319  [BUZZER0]  38.48,93.47 0 bottom
U$320  [ANT10]  51.82,70.36 90 top
U$321  [ANT20]  54.36,70.36 90 top
U$322  [READ0]  52.2,91.06 0 top
U$323  [ANT20]  54.36,70.36 90 bottom
U$324  [ANT10]  51.82,70.36 90 bottom
U$325  [INT#-[<]  49.28,70.23 90 bottom
U$326  [SCL-[)]  44.2,70.36 90 bottom
U$327  [SDA-[)]  41.66,70.36 90 bottom
U$328  [3V3-04]  39.12,70.36 90 bottom
U$329  [GND-04]  36.58,70.36 90 bottom
U$330  [RST#-[>]  46.74,70.23 90 bottom
U$331  [I_SUPER2_C-()-03]  46.86,78.74 0 bottom
U$332  [ADR0]  37.08,87.5 0 bottom
U$333  [INT0]  57.53,94.23 0 bottom
U$334  [PWR-()-04]  33.02,91.06 0 top
U$335  [QWIIC_COPYRIGHT_SMALL]  35.56,77.98 0 top
U$336  [RFID0]  47.35,95.17 0 top
U$337  [RST#-[>]  72.64,70.23 90 top
U$338  [SDA-[)]  67.56,70.36 90 top
U$339  [SCL-[)]  70.1,70.36 90 top
U$340  [GND-04]  62.48,70.36 90 top
U$341  [3V3-04]  65.02,70.36 90 top
U$342  [INT#-[<]  75.18,70.23 90 top
U$343  [BUZZER0]  64.39,93.47 0 bottom
U$344  [ANT10]  77.72,70.36 90 top
U$345  [ANT20]  80.26,70.36 90 top
U$346  [READ0]  78.11,91.06 0 top
U$347  [ANT20]  80.26,70.36 90 bottom
U$348  [ANT10]  77.72,70.36 90 bottom
U$349  [INT#-[<]  75.18,70.23 90 bottom
U$350  [SCL-[)]  70.1,70.36 90 bottom
U$351  [SDA-[)]  67.56,70.36 90 bottom
U$352  [3V3-04]  65.02,70.36 90 bottom
U$353  [GND-04]  62.48,70.36 90 bottom
U$354  [RST#-[>]  72.64,70.23 90 bottom
U$355  [I_SUPER2_C-()-03]  72.77,78.74 0 bottom
U$356  [ADR0]  62.99,87.5 0 bottom
U$357  [INT0]  83.44,94.23 0 bottom
U$358  [PWR-()-04]  58.93,91.06 0 top
U$359  [QWIIC_COPYRIGHT_SMALL]  61.47,77.98 0 top
U$360  [RFID0]  73.25,95.17 0 top
U$361  [RST#-[>]  98.55,70.23 90 top
U$362  [SDA-[)]  93.47,70.36 90 top
U$363  [SCL-[)]  96.01,70.36 90 top
U$364  [GND-04]  88.39,70.36 90 top
U$365  [3V3-04]  90.93,70.36 90 top
U$366  [INT#-[<]  101.09,70.23 90 top
U$367  [BUZZER0]  90.3,93.47 0 bottom
U$368  [ANT10]  103.63,70.36 90 top
U$369  [ANT20]  106.17,70.36 90 top
U$370  [READ0]  104.01,91.06 0 top
U$371  [ANT20]  106.17,70.36 90 bottom
U$372  [ANT10]  103.63,70.36 90 bottom
U$373  [INT#-[<]  101.09,70.23 90 bottom
U$374  [SCL-[)]  96.01,70.36 90 bottom
U$375  [SDA-[)]  93.47,70.36 90 bottom
U$376  [3V3-04]  90.93,70.36 90 bottom
U$377  [GND-04]  88.39,70.36 90 bottom
U$378  [RST#-[>]  98.55,70.23 90 bottom
U$379  [I_SUPER2_C-()-03]  98.68,78.74 0 bottom
U$380  [ADR0]  88.9,87.5 0 bottom
U$381  [INT0]  109.35,94.23 0 bottom
U$382  [PWR-()-04]  84.84,91.06 0 top
U$383  [QWIIC_COPYRIGHT_SMALL]  87.38,77.98 0 top
U$384  [RFID0]  99.16,95.17 0 top
U$385  [RST#-[>]  124.46,70.23 90 top
U$386  [SDA-[)]  119.38,70.36 90 top
U$387  [SCL-[)]  121.92,70.36 90 top
U$388  [GND-04]  114.3,70.36 90 top
U$389  [3V3-04]  116.84,70.36 90 top
U$390  [INT#-[<]  127,70.23 90 top
U$391  [BUZZER0]  116.2,93.47 0 bottom
U$392  [ANT10]  129.54,70.36 90 top
U$393  [ANT20]  132.08,70.36 90 top
U$394  [READ0]  129.92,91.06 0 top
U$395  [ANT20]  132.08,70.36 90 bottom
U$396  [ANT10]  129.54,70.36 90 bottom
U$397  [INT#-[<]  127,70.23 90 bottom
U$398  [SCL-[)]  121.92,70.36 90 bottom
U$399  [SDA-[)]  119.38,70.36 90 bottom
U$400  [3V3-04]  116.84,70.36 90 bottom
U$401  [GND-04]  114.3,70.36 90 bottom
U$402  [RST#-[>]  124.46,70.23 90 bottom
U$403  [I_SUPER2_C-()-03]  124.59,78.74 0 bottom
U$404  [ADR0]  114.81,87.5 0 bottom
U$405  [INT0]  135.25,94.23 0 bottom
U$406  [PWR-()-04]  110.74,91.06 0 top
U$407  [QWIIC_COPYRIGHT_SMALL]  113.28,77.98 0 top
U$408  [RFID0]  125.07,95.17 0 top
U$409  [RST#-[>]  150.37,70.23 90 top
U$410  [SDA-[)]  145.29,70.36 90 top
U$411  [SCL-[)]  147.83,70.36 90 top
U$412  [GND-04]  140.21,70.36 90 top
U$413  [3V3-04]  142.75,70.36 90 top
U$414  [INT#-[<]  152.91,70.23 90 top
U$415  [BUZZER0]  142.11,93.47 0 bottom
U$416  [ANT10]  155.45,70.36 90 top
U$417  [ANT20]  157.99,70.36 90 top
U$418  [READ0]  155.83,91.06 0 top
U$419  [ANT20]  157.99,70.36 90 bottom
U$420  [ANT10]  155.45,70.36 90 bottom
U$421  [INT#-[<]  152.91,70.23 90 bottom
U$422  [SCL-[)]  147.83,70.36 90 bottom
U$423  [SDA-[)]  145.29,70.36 90 bottom
U$424  [3V3-04]  142.75,70.36 90 bottom
U$425  [GND-04]  140.21,70.36 90 bottom
U$426  [RST#-[>]  150.37,70.23 90 bottom
U$427  [I_SUPER2_C-()-03]  150.5,78.74 0 bottom
U$428  [ADR0]  140.72,87.5 0 bottom
U$429  [INT0]  161.16,94.23 0 bottom
U$430  [PWR-()-04]  136.65,91.06 0 top
U$431  [QWIIC_COPYRIGHT_SMALL]  139.19,77.98 0 top
U$432  [RFID0]  150.98,95.17 0 top